# EAGLE board Schaltplan_Test_3 (EAGLE 8.2.2)
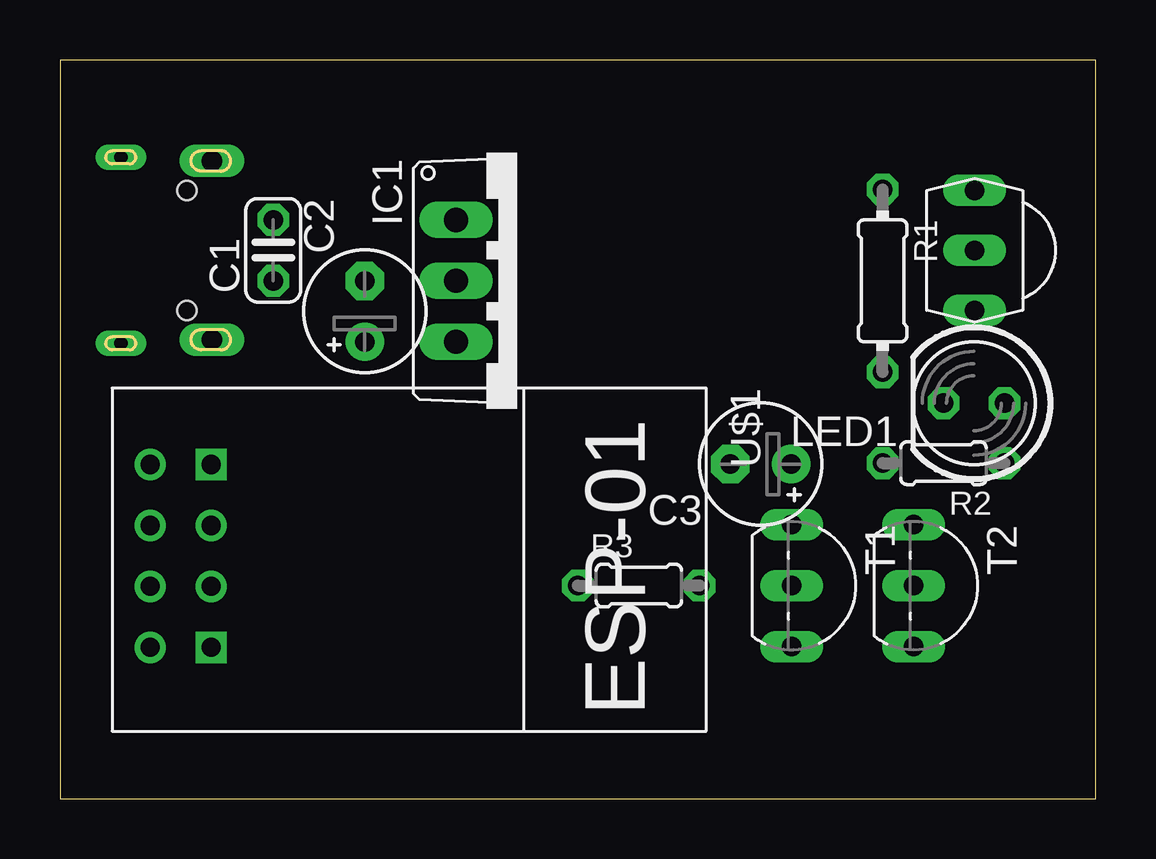
[diagram p0: board, top side]
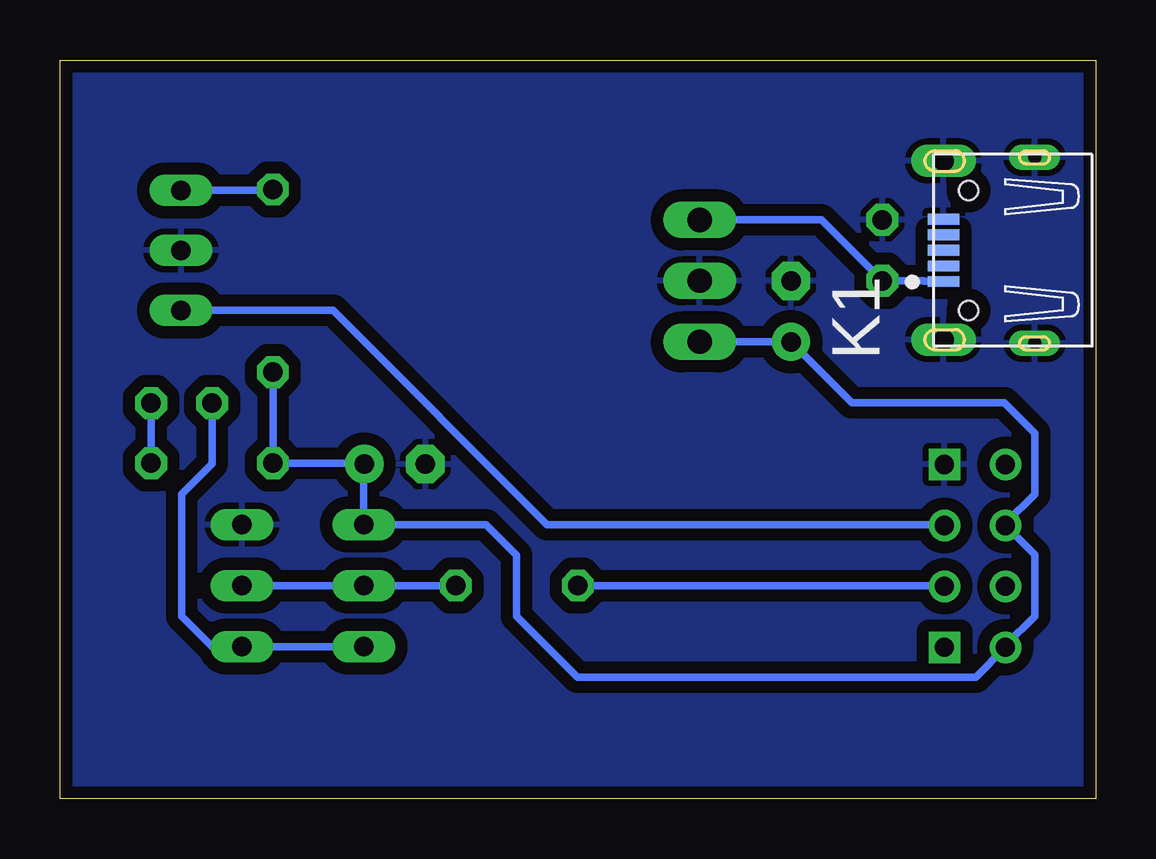
[diagram p1: board, bottom side, seen from below]

Size 43.17 x 30.79 mm. Coordinates in mm from the lower left corner, seen from the top.
Outline: 0,0 43.17,0 43.17,30.79 0,30.79 0,0
Copper layers (1*16): Top 0.035mm / dielectric 1.5mm / Bottom 0.035mm
Design rules "default *": minimum track width 6mil, minimum drill 0.35mm, track to track 10mil, track to pad 10mil, pad to pad 6mil, via to via 6mil, smd to smd 6mil, copper to edge 6mil, drill to drill 6mil, minimum pad ring 10mil, minimum via ring 8mil, stop-mask expansion 4mil, vias tented up to drill 0mil, thermal gap 10mil

## Footprints (pad centres in the part's own frame; a part is rotated, then mirrored left to right if it is on the bottom)
C025-024X044 = drill 0.813 octagon: 1 -1.27,0; 2 1.27,0
E2,5-5 = drill 0.813 pad 1.6: + -1.27,0 | drill 0.813 pad 1.6 octagon: - 1.27,0
TO220V = drill 1.016 long: 1 -2.54,-2.54; 2 0,-2.54; 3 2.54,-2.54
TSOP18XX = drill 0.813 long: GND -0.001,-0.027; OUT -2.501,-0.027; VCC 2.499,-0.027
629105150521 = smd 0.45 x 1.3: 1 -1.3,3.8; 2 -0.65,3.8; 3 0,3.8; 4 0.65,3.8; 5 1.3,3.8 | drill 0.85 pad 1.2 long: Z1 -3.725,3.8; Z2 3.725,3.8 | drill 0.55 pad 0.9 long: Z3 3.875,0; Z4 -3.875,0 | hole 0.8: -2.5,2.75; 2.5,2.75
LED5MM = drill 0.813 octagon: A -1.27,0; K 1.27,0
0204/7 = drill 0.813 octagon: 1 -3.81,0; 2 3.81,0
0204/5 = drill 0.813 octagon: 1 -2.54,0; 2 2.54,0
TO92-EBC = drill 0.813 long: B 0,-1.27; C -2.54,-1.27; E 2.54,-1.27
ESP01 = drill 0.8: CH_PD -1.285,-8.178; GPIO0 1.255,-5.638; GPIO2 -1.285,-5.638; RST 1.255,-8.178; TX -3.825,-8.178; VCC 3.795,-8.178 | drill 0.8 square: GND -3.825,-5.638; RX 3.795,-5.638

## Placement (x,y rotation side)
C1  100 nF  [C025-024X044]  8.89,22.86 90 top
C2  2,2 µF  [E2,5-5]  12.7,20.32 90 top
C3  10 µF  [E2,5-5]  29.21,13.95 180 top
IC1  LF 33 CDT  [TO220V]  19.05,21.59 270 top
IR-TRANSMITTER  TSOP1833  [TSOP18XX]  38.1,22.86 90 top
K1  [629105150521]  2.54,22.86 90 bottom
LED1  IR-LED  [LED5MM]  38.1,16.49 180 top
R1  10  [0204/7]  34.29,21.59 270 top
R2  18  [0204/5]  36.83,13.99 180 top
R3  1K  [0204/5]  24.13,8.89 0 top
T1  BC546A  [TO92-EBC]  31.77,8.89 270 top
T2  BC556A  [TO92-EBC]  36.85,8.89 270 top
U$1  ESP01  [ESP01]  11.94,10.11 270 top

## Library data of the parts
C1-C3 = rcl
IC1 = linear
IR-TRANSMITTER = tsop
K1 = Wurth_Elektronik_Electromechanic_Input-Output_Connectors_rev15c
LED1 = led
R1-R3 = resistor
T1 = transistor-npn
T2 = transistor-pnp
U$1 = esp8266modules

## Nets
+3V3: C2.+ C3.+ IC1.3 R1.2 R2.2 T1.C U$1.CH_PD U$1.VCC
+5V: C1.1 IC1.1 K1.1
GND: C1.2 C2.- C3.- IC1.2 IR-TRANSMITTER.GND K1.5 K1.Z1 K1.Z2 K1.Z3 K1.Z4 T2.C U$1.GND
N$1: IR-TRANSMITTER.VCC R1.1
N$2: R3.2 T1.B T2.B
N$8: LED1.K T1.E T2.E
N$10: LED1.A R2.1
VDD: R3.1 U$1.GPIO0
VSS: IR-TRANSMITTER.OUT U$1.GPIO2

## Tracks (layer width: path | path; a pad name or v marks a point on that pad's centre or on a via)
+3V3
  Bottom 0.305: IC1.3 C2.+ 10.16,16.51 3.81,16.51 2.54,15.24 2.54,12.7 3.76,11.48 U$1.CH_PD 2.54,10.18 2.54,7.62 3.76,6.4 U$1.VCC 5,5.08 21.59,5.08 24.13,7.62 24.13,10.16 25.4,11.43 T1.C 30.51,13.98 | 30.51,13.98 C3.+ | 30.51,13.98 30.52,13.99 R2.2 R1.2
+5V
  Bottom 0.305: IC1.1 11.43,24.13 C1.1 7.17,21.59 7.16,21.58 6.36,21.58 K1.1
GND
  pour Bottom (isolate 0.508): 0,0 43.18,0 43.18,30.48 0,30.48
N$1
  Bottom 0.305: R1.1 34.33,25.36 IR-TRANSMITTER.VCC
N$2
  Bottom 0.305: R3.2 T1.B T2.B
N$8
  Bottom 0.305: T1.E T2.E 36.83,6.35 38.1,7.62 38.1,12.7 36.83,13.97 LED1.K
N$10
  Bottom 0.305: LED1.A R2.1
VDD
  Bottom 0.305: U$1.GPIO0 6.33,8.89 R3.1
VSS
  Bottom 0.305: U$1.GPIO2 6.33,11.43 22.86,11.43 31.79,20.36 IR-TRANSMITTER.OUT